# Altium PCB electrodo.PcbDoc
Units mm, origin at the board's own origin, x right, y up, seen from the top; angles counter-clockwise.
Board outline 25 x 75 mm, 2 copper layers (Top Layer, Bottom Layer); 1 components, 0 nets, 7 pads, 0 vias.
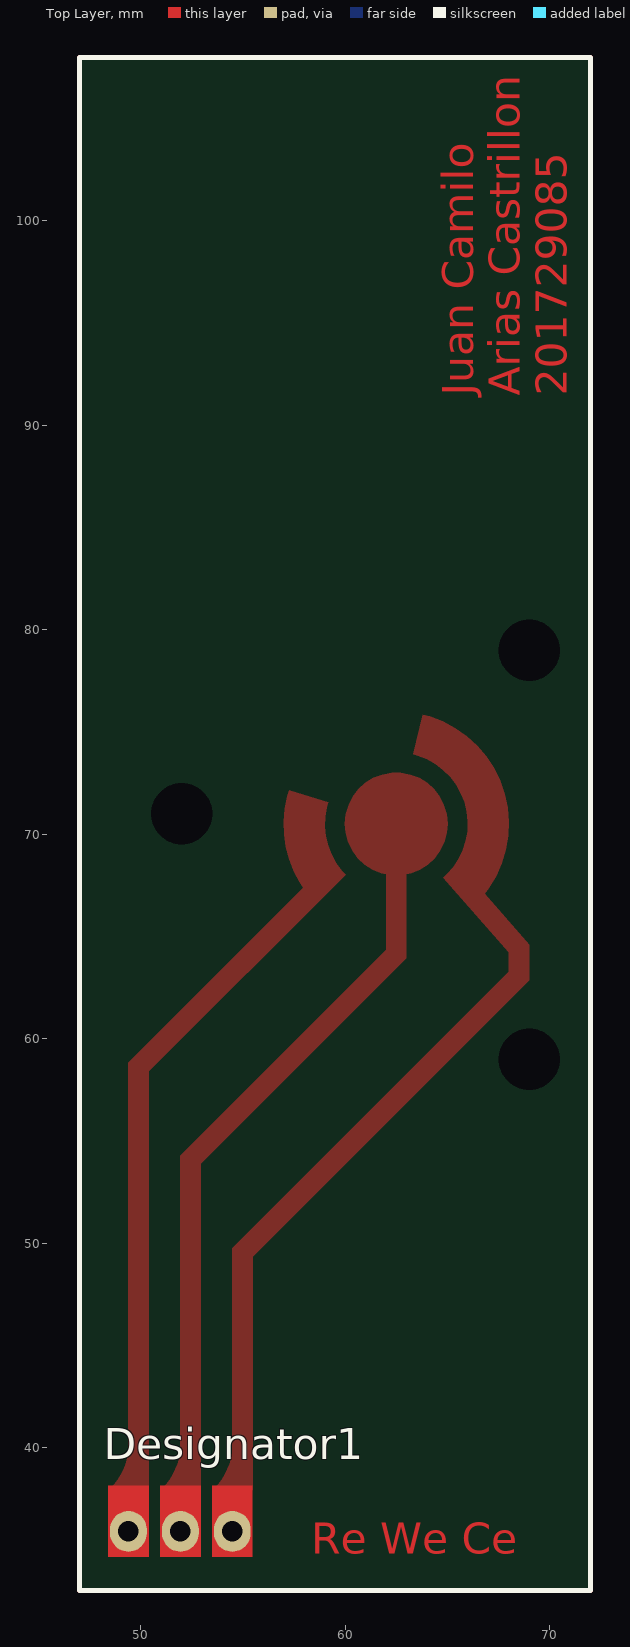
[diagram p0: Top Layer view]
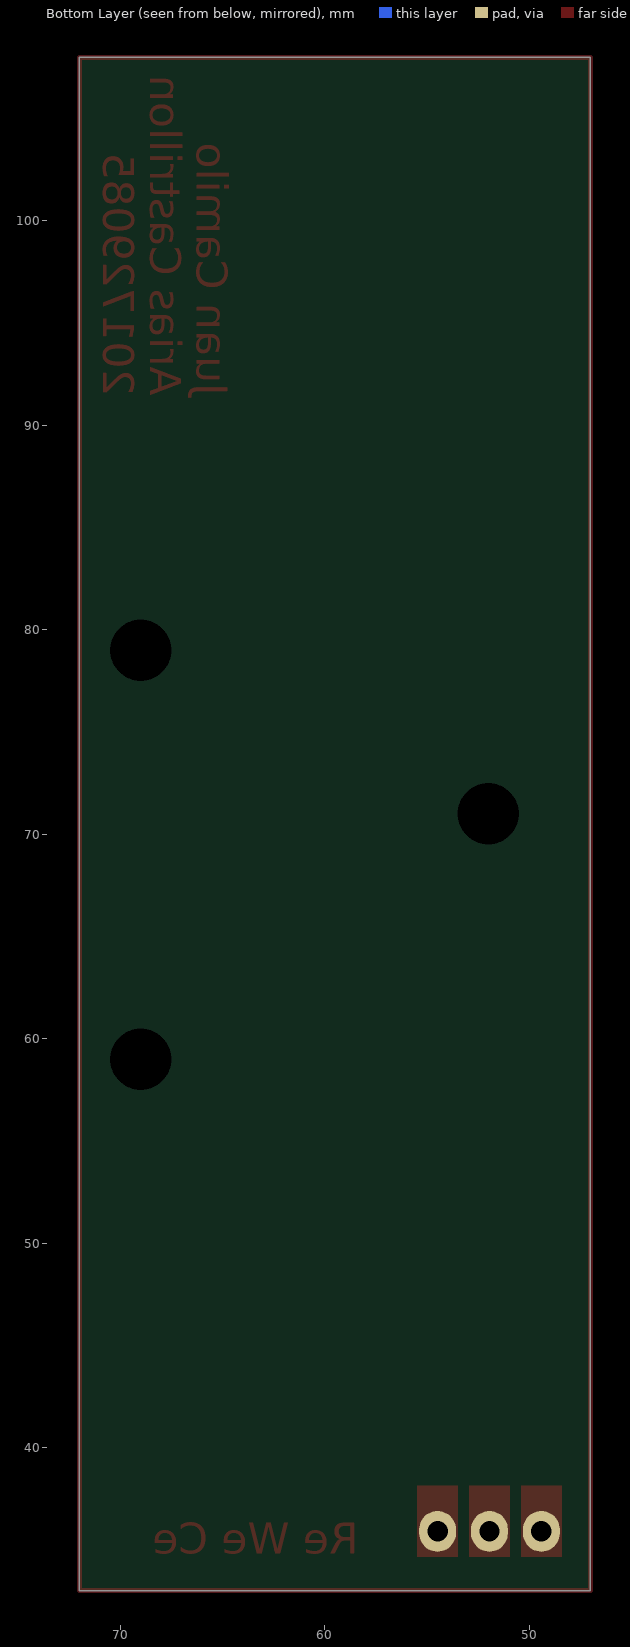
[diagram p1: Bottom Layer view, seen from below]

## Layer stack, top to bottom
Top Solder: solder mask 0.0102, Solder Resist, Dk 3.5
Top Layer: signal copper 0.0356
Dielectric 1: dielectric 0.32, FR-4, Dk 4.8
Bottom Layer: signal copper 0.0356
Bottom Solder: solder mask 0.0102, Solder Resist, Dk 3.5

## Board outline
47,33 47,108 72,108 72,33

## Design rules (kind name [scope] priority, off if disabled: settings)
Clearance [All] p1: gap=0.254 ignorepadtopadclearanceinfootprint=FALSE except(0: Arc-Hole Track-Hole SMDPad-Hole THPad-Hole Via-Hole Fill-Hole Poly-Hole Region-Hole Text-Hole)
PolygonConnect [All] p1: connectstyle=Relief reliefconductorwidth=0.254 reliefentries=4 polygonreliefangle="90 Angle" airgapwidth=0.254
RoutingVias [All] p1: holewidth=0.711 width=1.27 viastyle="Through Hole" minholewidth=0.711 minwidth=1.27 maxholewidth=0.711 maxwidth=1.27
SolderMaskExpansion [All] p1: expansion=0.102 istentingtop=FALSE
Width [All] p1: maxlimit=0.254 minlimit=0.254 preferedwidth=0.254
30 further rules are at their usual default settings.

## Components (designator, comment, footprint, x,y, rotation, side; value= is the part's Value field where it differs from the comment)
Designator1 "Comment" PCBComponent_1 51.94,35.9 r0 top

## Footprints (in the part's own frame and the unit in brackets; to place one, negate y for a bottom-side part, rotate by r counter-clockwise, add the part's x,y. Pads: shape width x height; smd on the part's side, far side on the other; paste and mask are expansions set on the pad)
PCBComponent_1 [mm]
  oval 1.8x2 hole 1: 1(-2.54,0) 1(-2.54,0) 2(0,0) 3(2.54,0)
  Top Layer region: -3.54,-1.25 -1.54,-1.25 -1.54,2.25 -3.54,2.25
  Top Layer region: -1,-1.25 1,-1.25 1,2.25 -1,2.25
  Top Layer region: 1.54,-1.25 3.54,-1.25 3.54,2.25 1.54,2.25

## Free pads (board coordinates)
  round 1.524 hole 3 unplated: 1(52,71) 2(69,79) 3(69,59)

## Nets (pads, with @x,y where several pads share a name; then routed paths per layer and width w, separated by ;. In a path a pad name is that pad's centre, name@x,y a point inside that pad or via, vN(x,y) a via of type N, cw(c..) or ccw(c..) an arc to the next point about the centre after c; other vN are vias at no path point)
pads on no net: Designator1.1 Designator1.2 Designator1.3
copper on no net: | length 200
  Top Layer w0.254: 47,33 72,33 72,108 47,108 47,33

## Polygon pours and split planes (outlines as drawn)
no net on Top Layer "NONET_L01_P003" (solid, pour order 3): 48.4,37.9 50.4,37.9 50.4,58.4 60.025,68.025 cw(c62.501,70.5) 59.162,71.552 57.255,72.154 ccw(c62.486,70.498) 57.969,67.383 49.4,58.814 49.4,39.9 cw(c46.5,40.1)
no net on Top Layer "NONET_L01_P002" (solid, pour order 2): 50.94,37.9 52.94,37.9 52.94,53.869 63,63.929 63,68.051 ccw(c62.5,70.5) 62,68.051 62,64.343 51.94,54.283 51.94,39.9 cw(c48.987,40.126)
no net on Top Layer "NONET_L01_P001" (solid, pour order 1): 53.48,37.9 55.48,37.9 55.48,49.338 69,62.858 69,64.605 66.818,67.093 ccw(c62.511,70.504) 63.807,75.842 63.332,73.9 cw(c62.508,70.502) 64.808,67.869 68,64.228 68,63.272 54.48,49.752 54.48,39.9 cw(c51.58,40.1)
no net on Top Solder "NONET_L-01_P-001" (solid): 60.757,68.758 61.861,67.654 65.662,66.031 ccw(c62.881,70.325) 67.688,68.574 ccw(c62.427,70.49) 64.929,75.499 ccw(c62.887,71.412) 63.751,75.899 ccw(c61.745,65.505) 63.466,75.95 ccw(c62.556,70.487) 57.78,73.29 57.618,72.988 ccw(c62.303,70.481) 58.636,66.637

## Other copper
Top Layer:
  text "Juan Camilo / Arias Castrillon / 201729085" at 70.83,91.45 h1.52 r90
  text "Re We Ce" at 58.33,34.8 h1.52

## Silkscreen, mask and mechanical layers (free items; w line width, h text height)
Top Overlay:
  the board outline again, w0.254
Top Solder:
  pour cut-out: 66.151,66.391 cw(c62.621,73.474) 58.636,66.637 60.757,68.758 60.869,68.646 ccw(c62.521,70.512) 64.173,68.646 64.41,68.41
  lines w0.1: 58.636,66.637 cw(c62.525,70.526) 66.151,66.391 64.173,68.646 cw(c62.525,70.526) 60.757,68.758 58.636,66.637
  lines w0.254: 47,33 72,33 72,108 47,108 47,33
Mechanical 2:
  circle w0.005: c62.364,70.364 r0.002
  circle w0.005: c64.012,68.484 r0.002
  circle w0.005: c62.364,70.364 r0.002

## Dimensions
47,33 to 72,33 on Mechanical 1
47,108 to 47,33 on Mechanical 1